# Altium PCB Thingy91_PV_Board.PcbDoc
Units mm, origin at the board's own origin, x right, y up, seen from the top; angles counter-clockwise.
Board outline 50.8 x 50.4 mm, 2 copper layers (Top Layer, Bottom Layer); 3 components, 2 nets, 7 pads, 6 vias.
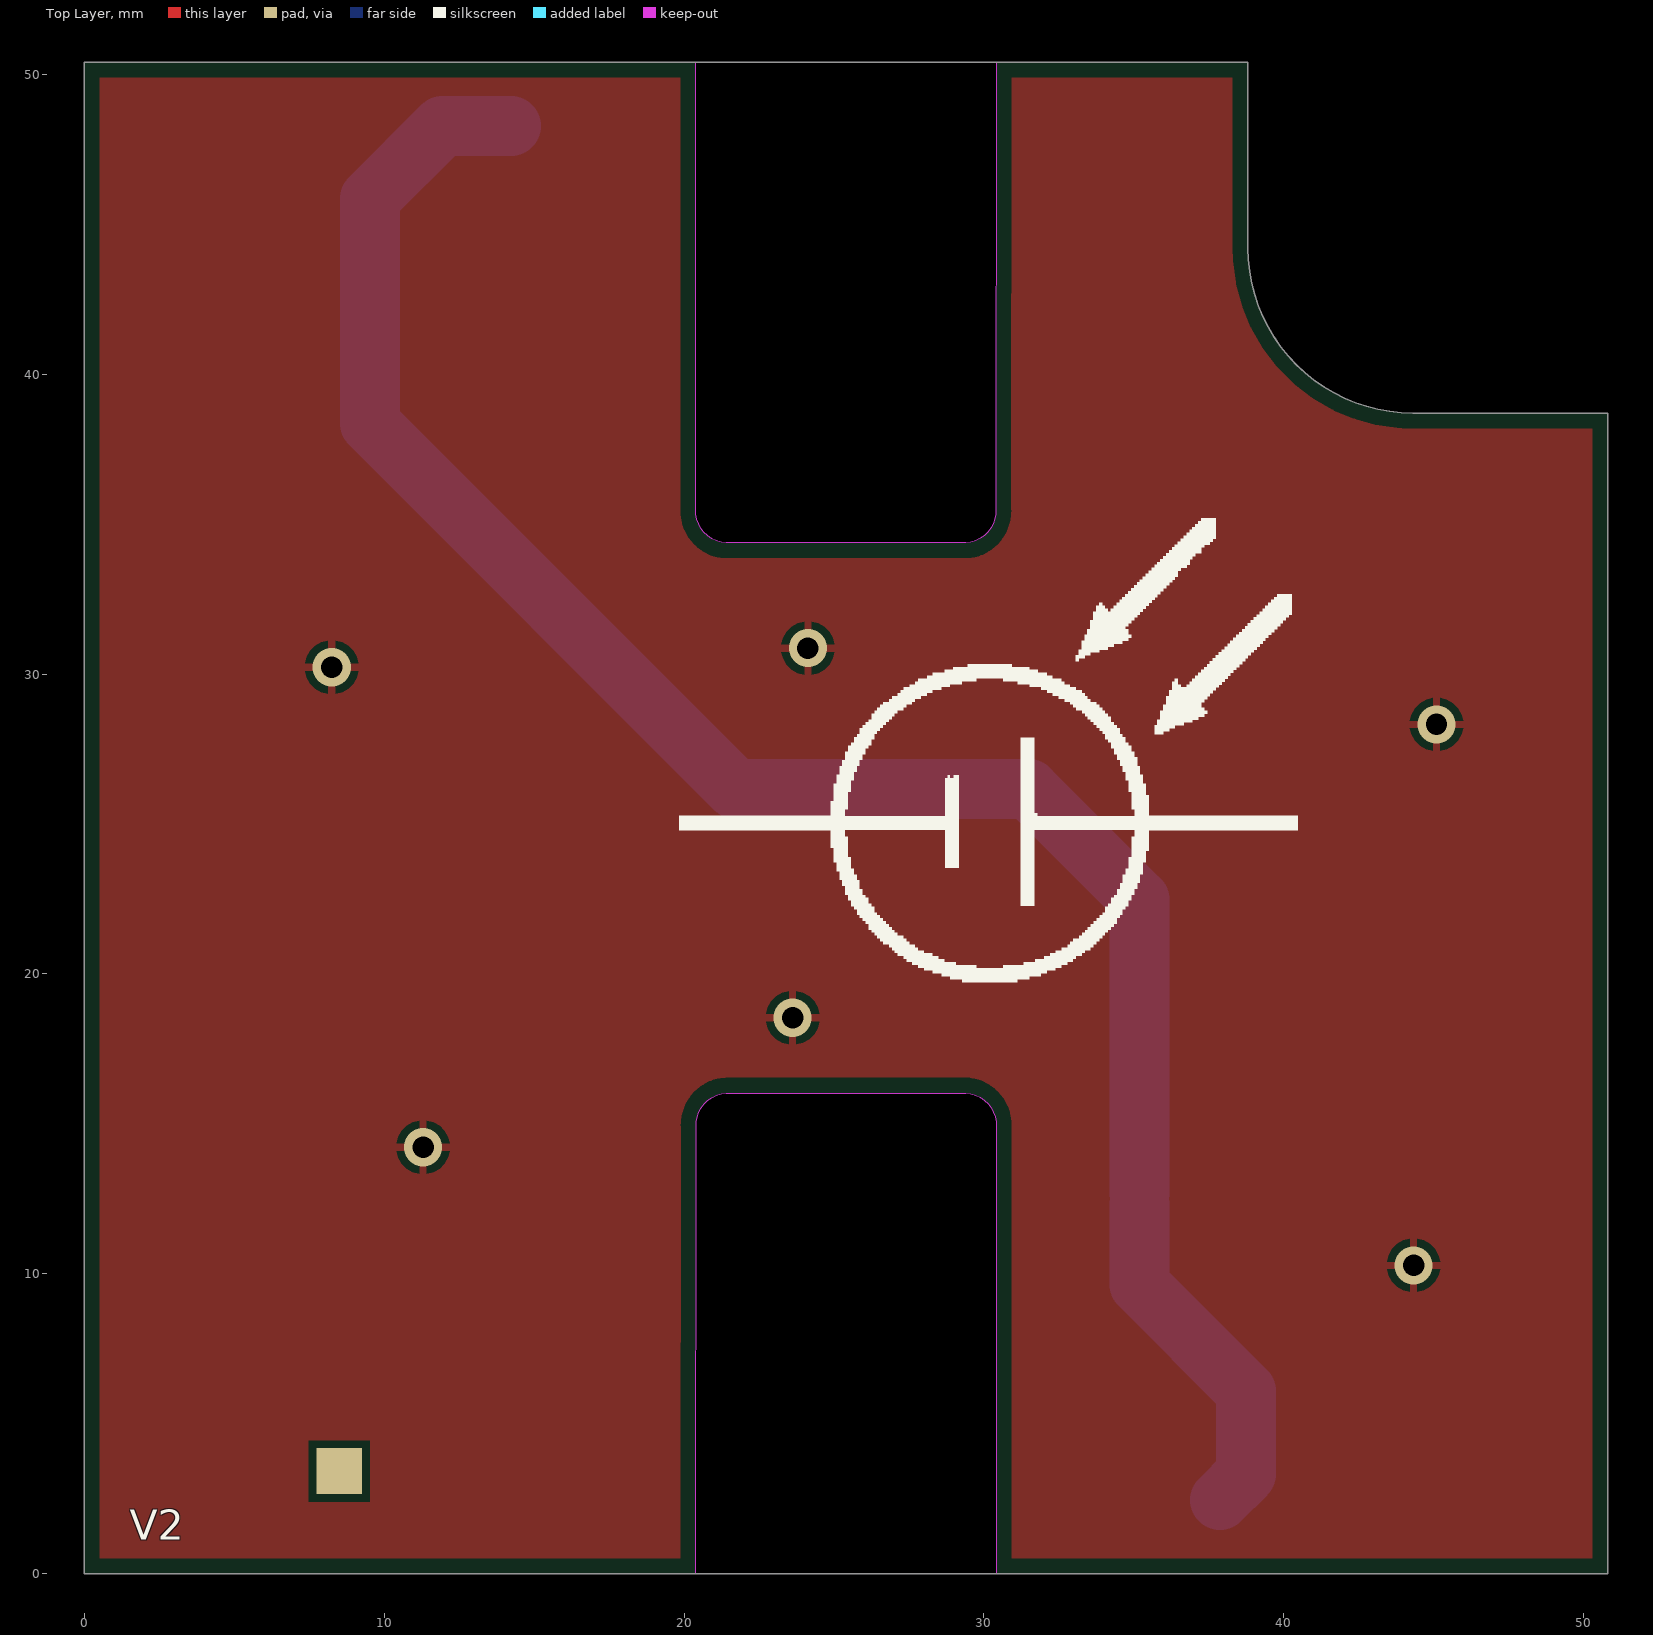
[diagram p0: Top Layer view]
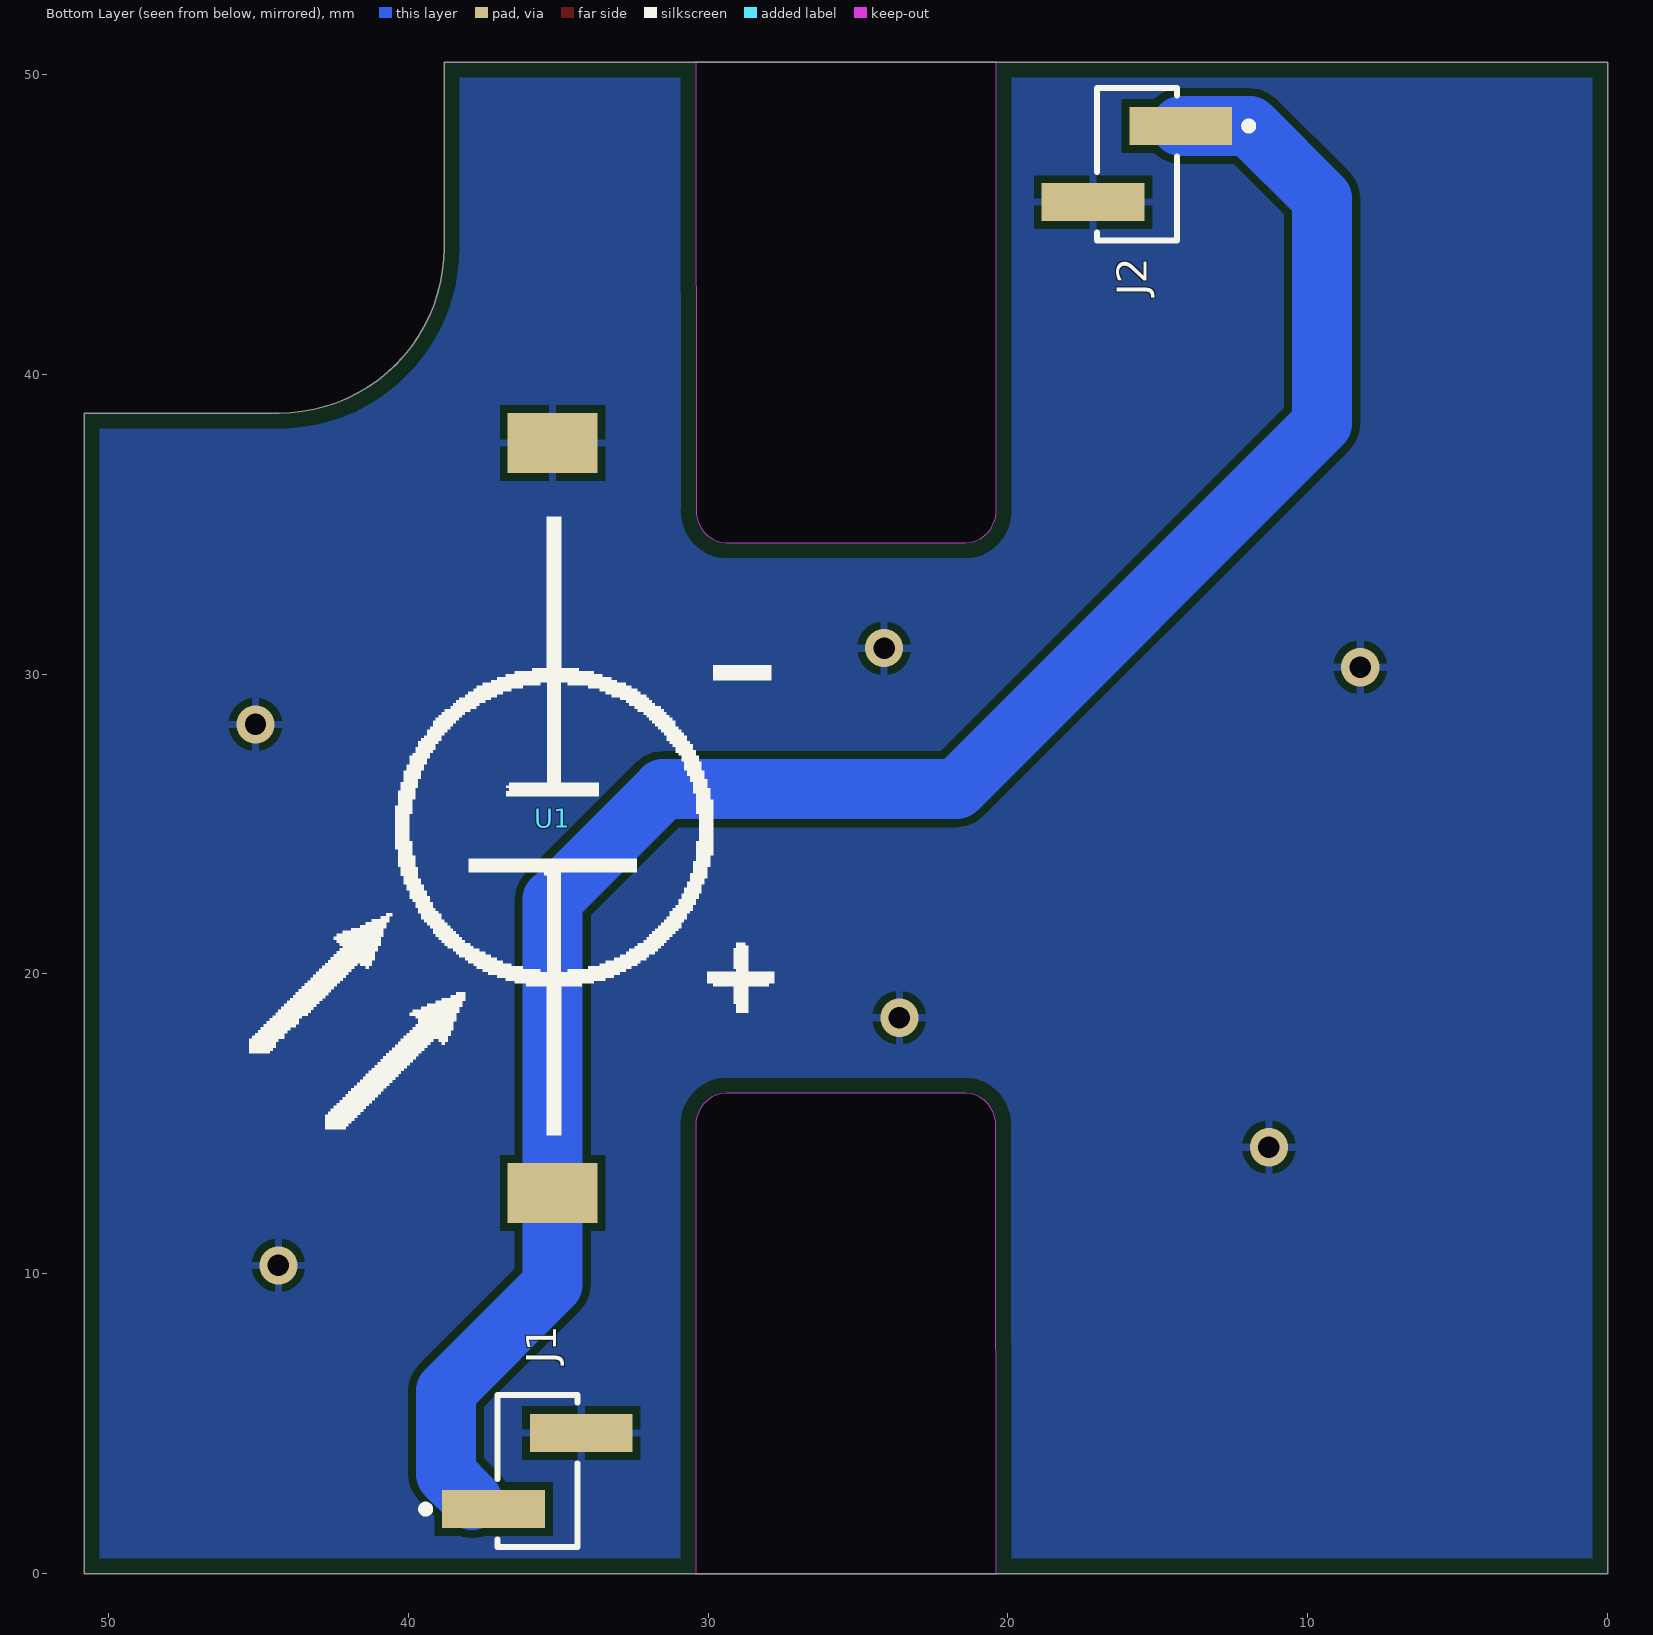
[diagram p1: Bottom Layer view, seen from below]

## Layer stack, top to bottom
Top Solder: solder mask 0.0102, Solder Resist, Dk 3.5
Top Layer: signal copper 0.0356
Dielectric 1: dielectric 0.32, FR-4, Dk 4.8
Bottom Layer: signal copper 0.0356
Bottom Solder: solder mask 0.0102, Solder Resist, Dk 3.5

## Board outline
0,0 50.8,0 50.8,38.7 44.3,38.7 cw(c44.3,44.2) 38.8,44.2 38.8,50.4 0,50.4
cut-out: 20.395,50.4 30.405,50.4 30.392,35.5 cw(c29.334,35.432) 29.4,34.373 21.4,34.373 cw(c21.46,35.438) 20.395,35.5
cut-out: 30.405,0 20.395,0 20.408,14.9 cw(c21.466,14.968) 21.4,16.027 29.4,16.027 cw(c29.34,14.962) 30.405,14.9

## Design rules (kind name [scope] priority, off if disabled: settings)
BoardOutlineClearance [All] p1: gap=0.512 ignorepadtopadclearanceinfootprint=FALSE except(0: Arc-SplitContinuation Track-SplitContinuation SMDPad-SplitContinuation THPad-SplitContinuation Via-SplitContinuation Fill-SplitContinuation Poly-SplitContinuation Region-SplitContinuation Text-SplitContinuation)
Clearance [All] p1: gap=0.254 ignorepadtopadclearanceinfootprint=FALSE except(0: Arc-Hole Track-Hole SMDPad-Hole THPad-Hole Via-Hole Fill-Hole Poly-Hole Region-Hole Text-Hole)
PolygonConnect [All] p1: connectstyle=Relief reliefconductorwidth=0.254 reliefentries=4 polygonreliefangle="90 Angle" airgapwidth=0.254
RoutingVias [All] p1: holewidth=0.711 width=1.27 viastyle="Through Hole" minholewidth=0.711 minwidth=1.27 maxholewidth=0.711 maxwidth=1.27
SolderMaskExpansion [All] p1: expansion=0.102 istentingtop=FALSE
Width [All] p1: maxlimit=2.5 minlimit=0.254 preferedwidth=0.254 minimp=50.000000 maximp=50.000000 favimp=50.000000
30 further rules are at their usual default settings.

## Components (designator, comment, footprint, x,y, rotation, side; value= is the part's Value field where it differs from the comment)
J1 "TSM-102-01-T-SV-TR" FP-TSM-102-01-T-SV-TR-MFG 35.687,3.429 r90 bottom
J2 "TSM-102-01-T-SV-TR" FP-TSM-102-01-T-SV-TR-MFG 15.7,47 r270 bottom
U1 "AM-5308" PCBComponent_1 35.179,25.2 r0 top

## Footprints (in the part's own frame and the unit in brackets; to place one, negate y for a bottom-side part, rotate by r counter-clockwise, add the part's x,y. Pads: shape width x height; smd on the part's side, far side on the other; paste and mask are expansions set on the pad)
FP-TSM-102-01-T-SV-TR-MFG [mm]
  rect 1.27x3.43 smd paste+0 mask+0: 1(-1.27,1.46) 2(1.27,-1.46)
  silkscreen extent -2.54,-1.34 2.54,3.85, body extent -2.54,-2.64 2.54,2.64, height 10.24
PCBComponent_1 [mm]
  rect 3x2 smd far side mask+0.05: 1(0,-12.5) 2(0,12.5)

## Part data
J1 J2: library part CMP-02766-000113-1, "CONN HEADER SMD 2POS 2.54MM", Housing Color=Black, Max Current Rating=7A, Max Operating Temperature=105°C, Max Voltage Rating (AC)=475V, Min Operating Temperature=-55°C, Contact Material=Bronze, Contact Plating=Tin, Depth=2.54mm, Gender=Male, Housing Material=Polymer, Lead Free="Lead Free", Length=5.08mm, Number of Contacts=2, Number of Rows=1, Orientation=Straight, Packaging="Tape and Reel", Pitch=2.54mm, Radiation Hardening=No, REACH SVHC="No SVHC", Termination=Solder
U1: "AM-5308 Panasonic PV"

## Free pads (board coordinates)
  rect 1.524x1.524 smd: 1(8.509,3.429)

## Via types
v1: diameter 1.27, hole 0.711, Top Layer to Bottom Layer, tented both sides, 6 vias

## Nets (pads, with @x,y where several pads share a name; then routed paths per layer and width w, separated by ;. In a path a pad name is that pad's centre, name@x,y a point inside that pad or via, vN(x,y) a via of type N, cw(c..) or ccw(c..) an arc to the next point about the centre after c; other vN are vias at no path point)
DCIN: J1.1 J2.1 U1.1 | length 67.3
  Bottom Layer w1.5: U1.1@35.179,12.319 U1.1
  Bottom Layer w2: J2.1 11.948,48.27 9.525,45.847 9.525,38.354 21.717,26.162 31.496,26.162 35.179,22.479 U1.1 ; U1.1@35.179,12.319 35.179,9.652 38.735,6.096 38.735,3.331 J1.1@37.862,2.458
GND: J1.2 J2.2 U1.2
  other v1: 44.323,10.287 11.303,14.224 23.622,18.542 45.085,28.321 8.255,30.226 24.13,30.861

## Polygon pours and split planes (outlines as drawn)
GND on Bottom Layer "Bottom Layer-GND" (solid, pour order 0): 0,50.4 0,0 50.8,0 50.8,50.546
GND on Top Layer "Top Layer-GND" (solid, pour order 1): 0,50.4 0,0 50.8,0 50.8,50.546

## Silkscreen, mask and mechanical layers (free items; w line width, h text height)
Top Overlay:
  drawing of 3 lines, arcs and shapes, not listed
  text "V2" at 1.524,1.143 h1
Bottom Overlay:
  drawing of 5 lines, arcs and shapes, not listed
Mechanical 1:
  lines w0.15: 20.395,0 0,0 0,50.4 20.395,50.4 ; 20.399,0 20.399,15.026 cw(c21.4,15.026) 21.4,16.027 29.4,16.027 cw(c29.4,15.027) 30.4,15.027 30.4,0 ; 20.404,50.4 20.404,35.373 ccw(c21.404,35.373) 21.404,34.373 29.404,34.373 ccw(c29.404,35.374) 30.405,35.374 30.405,50.4 38.8,50.4 38.8,44.2 ccw(c44.3,44.2) 44.3,38.7 50.8,38.7 50.8,0 30.405,0